# Altium PCB ESP32_USBC_PCB.PcbDoc (part 2 of 3)
Units mil, origin at the board's own origin, x right, y up, seen from the top; angles counter-clockwise.
Board outline 2700 x 1000 mil, 4 copper layers (L1, L2, L3, L4), stack 61.583 mil thick; 64 components, 73 nets, 299 pads, 162 vias.
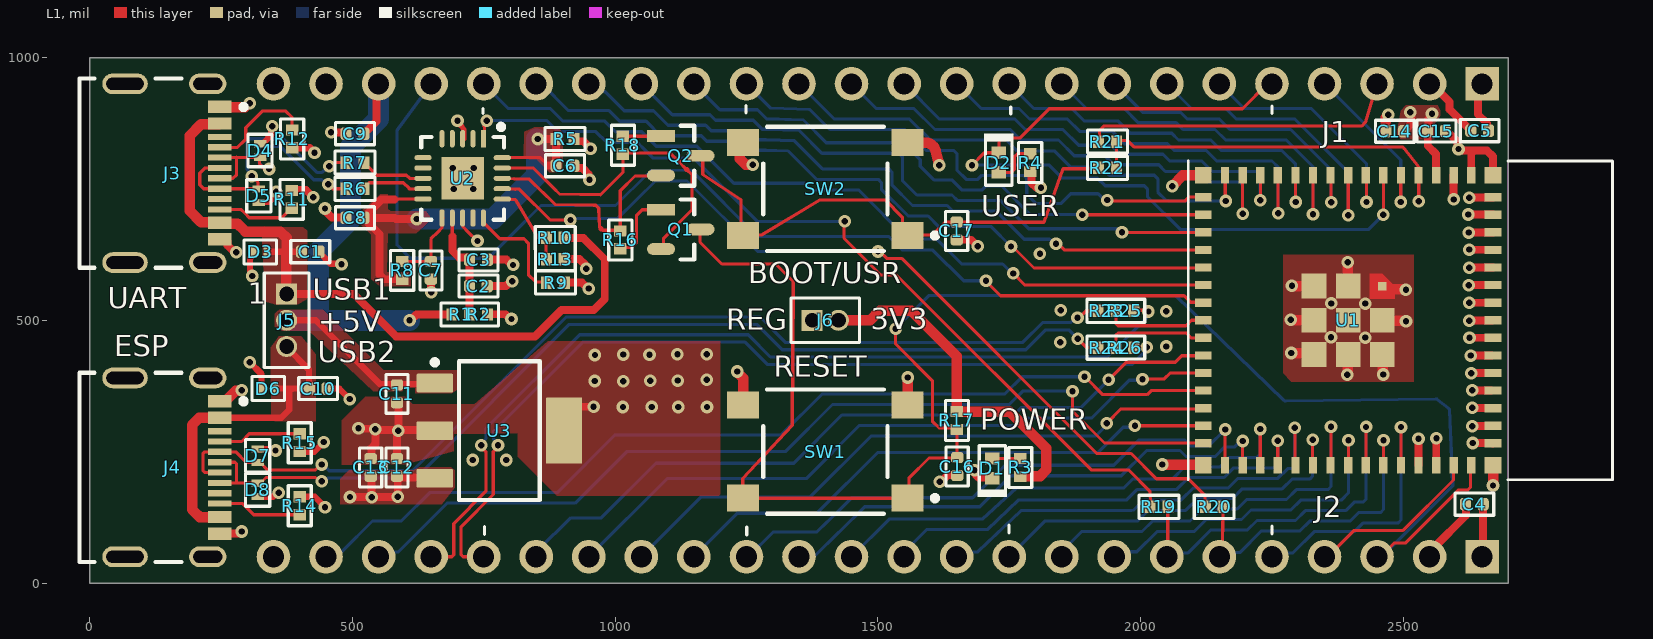
[diagram p0: L1 view]

## Part data (continued)
U3: "IC REG LINEAR 3.3V 1.5A SOT223-4", Case/Package=SOP, Dropout Voltage1-Max=550mV, Dropout Voltage1-Nom=340mV, Input Voltage Absolute-Max=20V, LCSC Part Number=C181262, Manufacturer="Texas Instruments", Min Input Voltage=3.8V, Operating Temperature, TJ-Max=125°C, Operating Temperature, TJ-Min=-40°C, Output Current1-Max=1.5A, Output Voltage1-Max=3.4V, Output Voltage1-Min=3.2V, Output Voltage1-Nom=3.3V, Package Body Material=Plastic, Package Shape=Rectangular, Package Style="SMALL OUTLINEMeter", Peak Reflow Temperature (Cel)=260°C, Supplier Part Number=296-24897-1-ND, Voltage Tolerance-Max=3%, Adjustability=FIXED, Category="Voltage Regulators - Linear", Channels=1, ComponentLink1Description=https://www.ti.com:443/lit/ds/symlink/tl1963a.pdf?src-supplier=IHS+Markit, ComponentLink1URL=https://www.ti.com:443/lit/ds/symlink/tl1963a.pdf?src-supplier=IHS+Markit, ComponentLink2Description=https://datasheet.ciiva.com/2046/-2046068.pdf?src-supplier=Digikey, ComponentLink2URL=https://datasheet.ciiva.com/2046/-2046068.pdf?src-supplier=Digikey, Height - Seated (Max)=1.8mm, JESD-30 Code=R-PDSO-G4, JESD-609 Code=e3, Length=6.5mm, Line Regulation-Max=0.01%, Load Regulation-Max=0.07%, Manufacturer Part Number=TL1963A-33DCYR, Max Supply Voltage=20V, Moisture Sensitivity Level=2, Number of Outputs=1, Packaging="Tape and Reel", Pins=4, Pricing="1=2.91, 10=2.614, 25=2.4712, 100=2.1417, 250=2.03188, 500=1.8232, 1000=1.53764 (USD)", Qualification Status="Not Qualified", Reach SVHC Compliant=Yes, Regulator Type="FIXED POSITIVE SINGLE OUTPUT LDO REGULATOR", RoHS=Yes, RoHS Compliant=Yes, Stock=4105, Supplier=Digikey, Surface Mount=Yes, Technology=BIPOLAR, Terminal Finish=Tin, Terminal Form="Gull Wing", Terminal Pitch=2.3mm, Terminal Position=DUAL, Width=3.5mm

## Via types
v1: diameter 24, hole 12, L1 to L4, tented both sides, 162 vias

## Nets (pads, with @x,y where several pads share a name; then routed paths per layer and width w, separated by ;. In a path a pad name is that pad's centre, name@x,y a point inside that pad or via, vN(x,y) a via of type N, cw(c..) or ccw(c..) an arc to the next point about the centre after c; other vN are vias at no path point)
+3V3: C4.2 C5.2 C14.2 C15.2 J1.2 J2.1 J6.2 R2.1 R3.2 R4.2 R5.1 R17.2 U1.3 | length 4519.3
  L1 w15: R2.1@755.46,511.41 791.71,511.41 800.61,502.51 v1(803.04,502.51) ; R5.1@923.01,845.42 923.01,842.82 925.14,840.69 940.06,840.69 953.35,827.4 v1(953.35,826.44) ; R4.2@1790.35,782.64 1792.42,780.57 1792.42,761.15 1801.41,752.16 v1(1810.38,752.16) ; C14.2@2500.77,859.74 2500.77,860.92 2503.9,864.05 2505.08,864.05 2515.72,874.7 2515.72,891.05 2513.43,893.35 v1(2513.43,895.78) ; C15.2@2545.04,861.03 2547.63,863.62 2547.63,883.26 2554.62,890.25 v1(2554.62,892.68) ; C15.2@2546.45,859.62 2546.45,832.05 2561.99,816.51 2561.99,775.96 U1.3@2562.36,775.59 ; J1.2@2550,950 2553.44,950 2588.08,915.37 2588.08,901.04 2623.98,865.13 2625.17,865.13 2628.3,862 C5.2@2628.3,860.82 ; J2.1@2651.93,51.93 C4.2@2651.93,150
  L1 w20: J6.2@1425,500 1485.24,500 1503.24,518 1563.69,518 1650.53,431.16 R17.2@1650.53,326.31 1750.92,326.31 1820.62,256.61 1820.62,215.34 1808.91,203.62 R3.2@1771.63,203.62
  L2 w15: v1(2513.43,895.78) 2515.15,894.06 2529.01,894.06 2530.39,892.68 v1(2554.62,892.68)
  L2 w20: 2555.03,842.67 2563.63,834.06 2563.63,483.78 2594.94,452.47 2594.94,216.06 2650,161.01 J2.1@2650,50
  L2 w40: v1(803.04,502.51) 868.48,567.95 868.48,746.98 947.94,826.44 1067.33,826.44 1141.61,752.16 1359.65,752.16 ; J6.2@1425,500 1425.32,500.32 1425.32,601.37 1359.65,667.04 1359.65,752.16 ; J1.2@2550,950 2554.59,945.41 2554.59,914.02 2555.43,913.18 2555.43,893.5 v1(2554.62,892.68) ; 2554.81,842.92 v1@2554.81,892.49 ; 2555.43,843.07 2543.99,831.63 1937.08,831.63 1857.62,752.16 1359.65,752.16
+3V3_FTDI: C6.2 C8.2 R5.2 R8.1 U2.10 U2.20 | length 925.1
  L1 w6: 580,730 580.63,730.63 U2.10@634.59,730.63 ; U2.20@787.45,808.99 788.07,809.61 810.04,809.61 ; 808,809.99 856.99,809.99 872.6,794.38
  L1 w15: C8.2@521.93,695 521.93,693.82 549.31,666.43 552,663.75 552,586.78 560.79,577.99 R8.1@595,577.99 R8.1@592.21,580.78 ; C8.2@521.93,696.18 555.75,730 580,730 ; C8.2@522.23,694.7 580.77,694.7 582.87,692.59 610.04,692.59 v1(622.77,692.59) ; v1(853,845) R5.2@887.99,845 887.86,844.87 887.86,794.09 C6.2@887.73,793.96 ; 872.6,794.38 C6.2@887.31,794.38
  L4 w40: v1@623.25,693.08 768.08,693.08 810.04,735.04 850.07,775.07 v1@850.07,845
+3V3_REG: C12.2 C13.2 J6.1 U3.3 | length 1385.3
  L1 w15: v1(495.65,163.59) 495.72,163.51 536.65,163.51 v1(536.73,163.44) ; C13.2@535,203.07 536.73,199.94 v1(536.73,163.44) ; U3.3@656.97,199.45 630.02,200.81 589.31,200.81 C12.2@585,203.07 586.42,199.94 v1(586.42,164.26) 586.01,163.85 537.14,163.85 v1(536.73,163.44)
  L2 w40: v1(495.65,163.59) 495.8,163.44 v1(536.73,163.44) 585.6,163.44 v1(586.42,164.26) 621.64,164.26 651.28,193.9 651.28,264.35 ; 1374.71,437.36 J6.1@1374.71,499.71
  L2 w60: 651.28,264.35 709.1,322.17 848.09,322.17 903.77,266.48 1203.83,266.48 1374.71,437.36
+5V: C9.2 C11.2 J1.22 J5.2 R1.1 U3.1 | length 1253.1
  L1 w12: J5.2@375,500 430.62,500 552.62,378 583.93,378 C11.2@585,376.93 586.81,378.74 655.16,378.74 U3.1@656.97,380.55
  L1 w15: C9.2@523.36,855.98 546.05,878.67 546.05,946.05 J1.22@550,950 ; v1(608.97,500.24) 611.4,500.24 622.29,511.13 R1.1@686.86,511.13
  L4 w40: J5.2@375,500 435.43,500 ; J1.22@550,950 550,882.53 496.93,829.46 496.93,692.07 435.43,630.57 435.43,500 ; v1@608.73,500 435.43,500
+5V_VBUS1: C1.2 D3.2 J3.A4B9 J3.B4A9 J5.1 R10.2 | length 1422
  L1 w12: D3.2@338.04,630.24 C1.2@402.74,630.24
  L1 w15: J5.1@375,550 502.74,550 583.46,469.28 847.48,469.28 897.88,519.69 959.4,519.69 980.29,540.58 980.29,616.02 939.58,656.74 R10.2@903.19,656.74
  L1 w20: J3.A4B9@247.08,873.86 246.26,873.03 212.14,873.03 190.56,851.46 190.56,708.38 212.14,686.81 245.47,686.81 J3.B4A9@247.24,685.04 ; J3.B4A9@247.64,685.43 249.45,683.62 281.55,683.62 295,670.17 296.69,668.48 363.13,668.48 374.85,656.76 374.85,631.16 ; J5.1@374.5,550.5 374.5,630.24
+5V_VBUS2: C10.2 D6.2 J4.A4B9 J4.B4A9 J5.3 | length 621.3
  L1 w12: J4.A4B9@247.64,314.57 364.57,314.57 380,330 380,364.57 385.43,370 ; D6.2@352.8,370 385.43,370 ; J5.3@375,450 375,448.59 417.62,405.97 417.62,370.45 C10.2@418.07,370 385.43,370
  L1 w20: J4.A4B9@247.33,314.26 208.64,314.26 200,305.62 195,300.62 195,140 200,135 209.4,125.6 J4.B4A9@247.64,125.59
+VCC_FTDI: C2.2 C3.2 R1.2 R2.2 U2.12 | length 189.7
  L1 w6: 690.32,659.46 U2.12@690.32,685.56
  L1 w15: 690.32,659.46 690.32,632.23 703.4,619.15 720.1,619.15 723.23,616.02 C3.2@723.23,614.84 ; C2.2@722.71,569.31 C3.2@722.71,610.69 ; C2.2@723.07,565 723.28,564.8 723.28,511.2 R1.2@723.48,511
BTN_GPIO0: C17.2 Q2.3 R22.1 SW2.1 SW2.2 | length 1013.4
  L1 w6: Q2.3@1162.42,812.99 1167,812.99 1167,777.1 1239.44,729.5 1239.44,684.01 SW2.2@1243.5,661.42 1269.01,662.24 1278.52,662.46 1389.38,728.98 1513.85,728.98 1546.66,696.16 1546.66,671.25 SW2.1@1556.5,661.42 ; SW2.1@1557.08,662 1603.85,662 1628.22,686.37 C17.2@1649.44,686.37 ; C17.2@1650.38,686.55 1815.9,686.55 1852.62,788.31 1914.38,788.31 R22.1@1920,790
CHIP_PU: C16.2 J2.3 Q1.3 R17.1 SW1.1 SW1.2 U1.45 | length 3238.9
  L1 w6: Q1.3@1161.71,672.28 1161.71,648.61 1203.36,606.96 1305.97,606.96 1336.27,576.66 1339.2,573.73 1339.2,569.51 1337.09,300.09 1243.01,199.01 SW1.2@1243.01,161.91 ; SW1.2@1243.5,161.42 SW1.1@1556.5,161.42 ; v1(1533.75,483.88) 1533.75,455.08 1603.73,385.1 1603.73,307.87 1616.58,295.02 1643.72,295.02 R17.1@1650.53,292.3 1650.59,286.67 C16.2@1650.59,243.65 ; SW1.1@1559.65,164.57 1559.65,200.26 1597.36,237.97 C16.2@1647.48,237.97 ; C16.2@1647.48,242.24 C16.2@1651.07,238.66 ; J2.3@2450,50 2456.41,50 2482.29,75.89 2503.6,75.89 2604.5,176.8 ; 2604.53,176.81 2622.14,176.81 2628,182.67 2628,223.12 U1.45@2629.29,224.41
  L1 w10.01: Q1.3@1161.71,672.28 Q1.3@1162.42,672.99 ; SW1.1@1556.5,161.42 SW1.1@1559.65,164.57
  L4 w6: v1(1533.75,483.88) 1596.79,546.92 2066.98,546.92 2272.19,348.13 2273.94,346.44 2276.41,346.44 2561.33,350.22 2563.47,350.22 2565.12,348.91 2585.8,332.36 2586.06,332.15 2587.95,330.26 2593.89,187.84 2593.89,185.23 2458.66,50 J2.3@2450,50
CON1_USB_N: D4.2 J3.A7 J3.B7 R6.1 | length 429.9
  L1 w6.23: J3.A7@247.64,770.08 247.72,770 273,770 279.76,776.76 279.76,809.95 ; J3.B7@248.13,809.95 J3.B7@247.64,809.45 248.01,809.82 322.88,809.82 323.5,809.2 323.5,797.2 332.88,787.83 v1(341.63,787.83) ; v1(454,759) 463,750 R6.1@487.99,750
  L4 w6.23: v1@339.58,788.07 336.42,791.23 330.69,791.23 322.48,799.44 322.48,827.69 326.13,831.34 362.58,831.34 426.76,767.16 441.47,767.16 449.63,759 v1(454,759)
CON1_USB_P: D5.2 J3.A6 J3.B6 R7.1 | length 501.7
  L1 w6.23: J3.A6@247.53,789.65 219.25,789.65 209.68,780.08 209.68,757.98 217.27,750.39 J3.B6@247.64,750.39 248,750.03 319.35,750.03 320.58,751.25 320.58,762.24 v1(308.51,774.31) ; v1(456,793) 463,800 R7.1@487.99,800
  L4 w6.23: v1(308.51,774.31) 308.51,778.23 299.89,786.85 299.89,841.92 303.54,845.57 368.48,845.57 432.65,781.39 442.45,781.39 454.06,793 v1(456,793)
CON2_USB_N: D7.2 J4.A7 J4.B7 R23.1 | length 1960.2
  L1 w6.03: J4.A7@247.28,210.6 219.24,210.6 215.71,214.13 215.71,245.92 219.24,249.45 J4.B7@247.48,249.45 ; J4.B7@247.64,249.61 J4.B7@247.48,249.45 ; v1(442.11,225.56) 439.56,225.56 428.94,214.94 339.46,214.94 324.95,229.44 298.56,229.44 278.55,249.45 J4.B7@247.48,249.45 ; v1(1880,505) 1883.76,505 1896.76,518 R23.1@1918.98,518
  L4 w6.03: v1(442.11,225.56) 445.65,225.56 445.65,224.15 456.12,213.68 614.59,213.68 907.03,506.12 1275.71,506.12 1323.94,457.89 1775.9,457.89 1813.67,495.66 1867.48,495.66 1876.82,505 v1(1880,505)
CON2_USB_P: D8.2 J4.A6 J4.B6 R24.1 | length 1922
  L1 w6.03: J4.A6@247.64,229.92 276.34,229.92 279.88,226.39 279.88,190.22 J4.B6@247.97,190.22 ; 279.88,190.24 301.9,190.24 D8.2@319.76,190.24 ; D8.2@320,190 324.92,190 335.83,200.91 429.9,200.91 437.25,193.56 v1(442.11,193.56) ; v1(1880.35,464.63) 1896.57,448.42 R24.1@1919.79,448.42
  L4 w6.03: v1(442.11,193.56) 446.98,193.56 453.06,199.65 620.4,199.65 912.84,492.09 1269.9,492.09 1318.13,443.86 1781.71,443.86 1819.48,481.63 1863.35,481.63 v1(1880.35,464.63)
CON_ESP_USB_N: J2.21 R25.1 | length 1740.3
  L1 w6.03: J2.21@650,50 689.45,50 692.99,53.53 692.99,112.99 754.27,174.28 754.27,249.77 745.33,258.71 v1(745.33,262.29) ; R25.1@1987.01,518 1988.16,519.15 2012.38,519.15 v1(2014.9,516.63)
  L4 w6.03: v1(745.33,262.29) 745.33,265.78 754.36,274.81 754.36,294.15 932.64,472.43 1253.32,472.43 1295.67,430.08 1312.07,430.08 1312.32,429.83 1787.53,429.83 1787.77,430.08 1936.95,430.08 2011.47,504.59 2011.47,513.19 v1(2014.9,516.63)
CON_ESP_USB_P: J2.20 R26.1 | length 1687.5
  L1 w6.03: J2.20@750,50 710.55,50 707.01,53.53 707.01,107.18 768.3,168.47 768.3,249.67 777.33,258.69 v1(777.33,262.18) ; R26.1@1987.01,448 1987.83,448.82 v1(2011.47,448.82) v1@2013.5,450.85
  L4 w6.03: v1(777.33,262.18) 777.33,265.76 768.39,274.7 768.39,288.34 938.45,458.4 1247.51,458.4 1290.19,415.72 1983.16,415.72 2011.47,444.03 v1(2011.47,448.82)
DTR_FTDI: Q2.2 R16.1 U2.18 | length 449.3
  L1 w6: U2.18@787.48,769.59 810.04,768.87 ; 808,769.26 837.03,768.33 838.7,766.69 883.12,723.12 885.96,720.34 959.35,718.95 963.38,718.88 969.02,713.24 970.27,676.9 973.06,674.12 975.99,671.19 1008.81,671.19 R16.1@1010,670 1010.01,746.7 1037.89,774.58 Q2.2@1086.56,774.58
ESP_USB_N: R23.2 R25.2 U1.23 | length 196.7
  L1 w6.03: R23.2@1952.99,518 1953.43,517.56 1953.43,493.25 1956.96,489.72 2086.65,489.72 2096.93,500 U1.23@2119.45,500
ESP_USB_P: R24.2 R26.2 U1.24 | length 195
  L1 w6.03: R26.2@1953.43,448.38 1953.43,472.15 1956.96,475.69 2086.87,475.69 2096.02,466.54 U1.24@2119.45,466.54
FTDI_RESET: C7.2 R8.2 U2.11 | length 146.5
  L1 w6: R8.2@595.1,611.91 C7.2@649.53,611.91 ; C7.2@649.62,611.82 649.62,654.84 663.4,668.62 670.38,675.6 670.38,692.32 U2.11@672.27,694.2
  L1 w10.01: R8.2@595,612.01 R8.2@595.1,611.91 ; C7.2@649.53,611.91 C7.2@649.62,611.82
FTDI_USB_N: R6.2 U2.9 | length 122.8
  L1 w6.23: R6.2@522.01,750 522.01,751.18 532.43,761.6 597.19,761.6 608,750.79 608.48,750.32 ; 610.51,749.93 U2.9@636.62,749.93
FTDI_USB_P: R7.2 U2.8 | length 125.7
  L1 w6.23: R7.2@522.01,800 522.01,798.82 529.52,791.3 530.92,791.3 546.39,775.83 603.08,775.83 608,770.92 608.92,770 ; 610.95,769.62 U2.8@636.62,769.62